# Altium PCB PCB1.PcbDoc
Units mm, origin at the board's own origin, x right, y up, seen from the top; angles counter-clockwise.
Board outline 75.06 x 40 mm, 2 copper layers (Top Layer, Bottom Layer); 15 components, 21 nets, 66 pads, 0 vias.
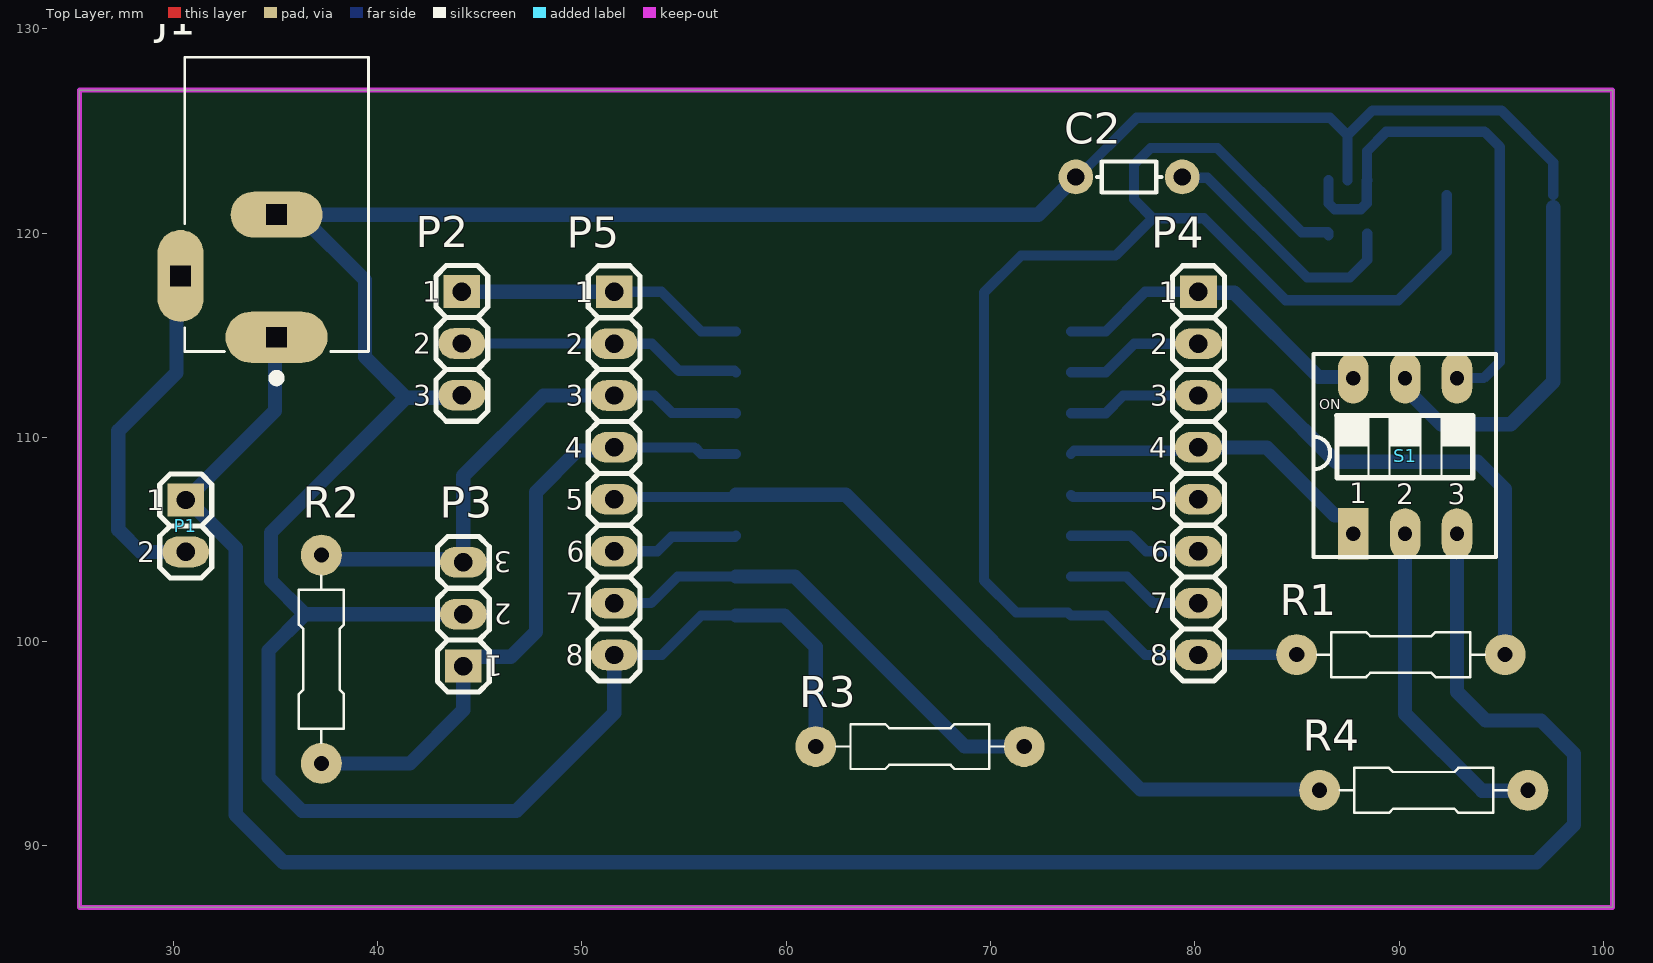
[diagram p0: Top Layer view]
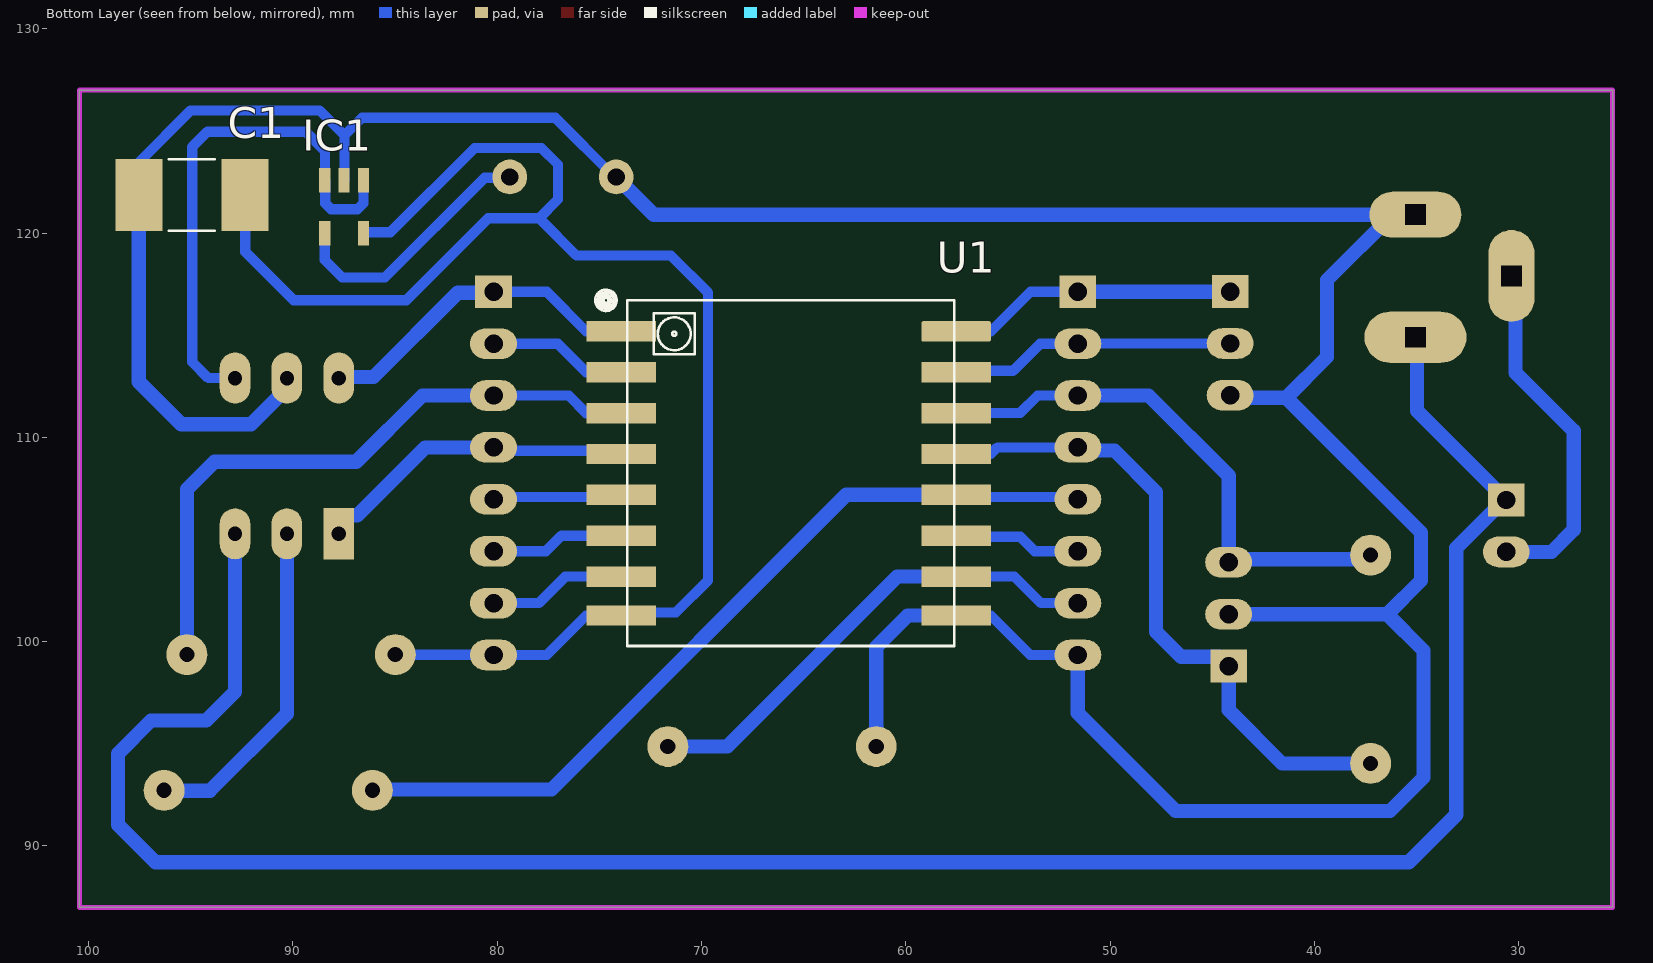
[diagram p1: Bottom Layer view, seen from below]

## Layer stack, top to bottom
Top Solder: solder mask 0.0102, Solder Resist, Dk 3.5
Top Layer: signal copper 0.0356
Dielectric 1: dielectric 0.32, FR-4, Dk 4.8
Bottom Layer: signal copper 0.0356
Bottom Solder: solder mask 0.0102, Solder Resist, Dk 3.5

## Board outline
25.4,86.995 25.4,127 100.457,127 100.457,86.995

## Design rules (kind name [scope] priority, off if disabled: settings)
Clearance Clearance_1 [All] p1: gap=0.254 ignorepadtopadclearanceinfootprint=FALSE except(0: Arc-Hole Track-Hole SMDPad-Hole THPad-Hole Via-Hole Fill-Hole Poly-Hole Region-Hole Text-Hole)
Clearance polygon [InPolygon] p2: gap=0.8 ignorepadtopadclearanceinfootprint=TRUE
PolygonConnect [All] p1: connectstyle=Relief reliefconductorwidth=0.254 reliefentries=4 polygonreliefangle="90 Angle" airgapwidth=0.254
RoutingVias [All] p1: holewidth=0.711 width=1.27 viastyle="Through Hole" minholewidth=0.711 minwidth=1.27 maxholewidth=0.711 maxwidth=1.27
SolderMaskExpansion [All] p1: expansion=0.102 istentingtop=FALSE
Width [All] p1: maxlimit=1 minlimit=0.254 preferedwidth=0.5
30 further rules are at their usual default settings.

## Components (designator, comment, footprint, x,y, rotation, side; value= is the part's Value field where it differs from the comment)
C1 "T491C106M025AT" CAPPC6032X280N 94.95,121.87 r0 bottom
C2 "Resistor vertical" Res50 77.99,122.75 r0 top value=470pF
IC1 "MIC5219BM5" SOT23-5 87.498,121.286 r0 bottom
J1 "PJ-002A" CUI_PJ-002A 35.052,114.904 r90 top
P1 "MHDR_1X02" MHDR1X02-254P 30.607,106.934 r270 top
P2 "MHDR_1X03" MHDR1X03-254P 44.12,117.14 r270 top
P3 "MHDR_1X03" MHDR1X03-254P 44.196,98.806 r90 top
P4 "MHDR_1X08" MHDR1X08-254P 80.18,117.13 r270 top
P5 "MHDR_1X08" MHDR1X08-254P 51.58,117.13 r270 top
R1 "10K" "Axial 0_25 W, 0_4 IN LEAD PITCH" 90.09,99.37 r180 top
R2 "4.7K" "Axial 0_25 W, 0_4 IN LEAD PITCH" 37.25,99.14 r90 top
R3 "10K" "Axial 0_25 W, 0_4 IN LEAD PITCH" 66.548,94.869 r0 top
R4 "1K" "Axial 0_25 W, 0_4 IN LEAD PITCH" 91.21,92.72 r180 top
S1 "switch3" switch 90.043,109.22 r0 top
U1 "ESP-07S" ESP07 65.913,109.347 r180 bottom

## Footprints (in the part's own frame and the unit in brackets; to place one, negate y for a bottom-side part, rotate by r counter-clockwise, add the part's x,y. Pads: shape width x height; smd on the part's side, far side on the other; paste and mask are expansions set on the pad)
"Axial 0_25 W, 0_4 IN LEAD PITCH" [mm] "Designer Abbas Basereh"
  round 2 hole 0.75: 1(5.1,0) 2(-5.1,0)
  silkscreen extent -4.1,-1.1 4.1,1.1, body extent -5.4,-1.16 5.36,1.16, height 3.63
CAPPC6032X280N [mm]
  rect 2.3x3.51 smd: 1(-2.61,0) 2(2.6,0)
  silkscreen extent -1.12,-1.75 1.12,1.75, body extent -3.15,-1.75 3.15,1.75, height 2.78
CUI_PJ-002A [mm]
  oval 2.5x5 hole 1 square: 1(0,0)
  oval 2.25x4.5 hole 1 square: 2(6,0)
  oval 4.5x2.25 hole 1 square: 3(3,4.7)
  silkscreen extent -2.2,-4.5 13.7,4.5, body extent -0.64,-4.45 13.76,4.95, height 11.01
ESP07 [mm]
  rect 3.4x1 smd: ADC(-8.026,3.841) EN(-8.026,1.841) GND(8.374,-8.064) GPIO0(8.374,-2.159) GPIO2(8.374,-4.159) GPIO4(8.374,-0.159) GPIO5(8.374,1.841) GPIO12(-8.026,-4.159) GPIO13(-8.026,-6.159) GPIO14(-8.026,-2.159) GPIO15(8.374,-6.159) GPIO16(-8.026,-0.159) REST(-8.026,5.841) RX(8.374,3.841) VCC(-8.026,-8.064)
  rrect17% 3.4x1 smd: TX(8.374,5.841)
  silkscreen extent -9.29,-9.56 8.27,7.89
MHDR1X02-254P [mm] "Male Header 1X02 with 2.54 mm Pitch"
  rect 1.6x1.8 hole 0.9: 1(0,0)
  oval 1.5x2.3 hole 0.9: 2(2.54,0)
  silkscreen extent -1.27,-1.27 3.81,1.27, body extent -1.27,-1.27 3.81,1.27, height 8.43
MHDR1X03-254P [mm] "Male Header 1X03 with 2.54 mm Pitch"
  rect 1.6x1.8 hole 0.9: 1(0,0)
  oval 1.5x2.3 hole 0.9: 2(2.54,0) 3(5.08,0)
  silkscreen extent -1.27,-1.27 6.35,1.27, body extent -1.27,-1.27 6.35,1.27, height 8.43
MHDR1X08-254P [mm] "Male Header 1X08 with 2.54 mm Pitch"
  rect 1.6x1.8 hole 0.9: 1(0,0)
  oval 1.5x2.3 hole 0.9: 2(2.54,0) 3(5.08,0) 4(7.62,0) 5(10.16,0) 6(12.7,0) 7(15.24,0) 8(17.78,0)
  silkscreen extent -1.27,-1.27 19.05,1.27, body extent -1.27,-1.27 19.05,1.27, height 8.43
Res50 [mm] "50mm Pin Spacing"
  round 1.7 hole 0.85: 1(-3.81,0) 2(1.397,0)
  silkscreen extent -2.77,-0.76 0.38,0.76
SOT23-5 [mm]
  rect 0.55x1.2 smd: 1(-0.95,-1.3) 2(0,-1.3) 3(0.95,-1.3) 4(0.95,1.3) 5(-0.95,1.3)
  body extent -1.45,-1.35 1.45,1.35, height 1.45
switch [mm]
  rect 1.5x2.5 hole 0.7: 1(-2.286,-3.937)
  oval 1.5x2.5 hole 0.7: 2(0.254,-3.937) 3(2.794,-3.937) 4(2.794,3.683) 5(0.254,3.683) 6(-2.286,3.683)
  silkscreen extent -4.23,-5.08 4.7,4.86, body extent -4.29,-5.07 4.79,4.83, height 6.8

## Part data
C1: "10ÂµF Molded Tantalum Capacitors 25V 2312 _6032 Metric_ 1.5Ohm", Package="2312 Kemet", Availability=Unavailable, MF=KEMET, MP=T491C106M025AT, Price=None, SnapEDA_Link=https://www.snapeda.com/parts/T491C106M025AT/KEMET/view-part/361304/?ref=snap
C2: "Resistor 0.5", Publisher="Seyed mohsen ghasemian", WEB=www.picpars.com
IC1: "Linear Voltage Regulator IC 1 Output 500mA SOT-23-5", Package="SOT-753 Micrel", Availability=Unavailable, MF=Micrel, MP=MIC5219BM5, Price=None, SnapEDA_Link=https://www.snapeda.com/parts/MIC5219BM5/Micrel/view-part/553192/?ref=snap
J1: "2,0 x 6,5 mm, 2,5 A, Yatay, AÃ§Ä±k Delik, Dc GÃ¼Ã§ JakÄ± KonnektÃ¶rÃ¼", Package=None, Availability=Unavailable, CUI_purchase_URL=https://www.cuidevices.com/product/interconnect/connectors/dc-power-connectors/jacks/pj-002a?utm_source=snapeda.com&utm_medium=referral&utm_campaign=snapedaBOM, MF="CUI Devices", MP=PJ-002A, Price=None, SnapEDA_Link=https://www.snapeda.com/parts/PJ-002A/CUI%20Devices/view-part/287588/?ref=snap
P1: "Male Header 1X02"
P2 P3: "Male Header 1X03"
P4 P5: "Male Header 1X08"
R1 R2 R3 R4: library part "RES Axial 0.25W", "RES Axial 0.25W", Data=4-1-2017, Desc.="RES Axial 0.25W", Designer="Abbas Basereh"
U1: "WiFi 802.11b/g/n Transceiver Module 2.4GHz ~ 2.5GHz PCB Trace Surface Mount", Package="Module RF Solutions", Availability=Unavailable, MF="RF Solutions", MP=ESP-07S, Price=None, SnapEDA_Link=https://www.snapeda.com/parts/ESP-07S/RF%20Solutions/view-part/1074529/?ref=snap

## Nets (pads, with @x,y where several pads share a name; then routed paths per layer and width w, separated by ;. In a path a pad name is that pad's centre, name@x,y a point inside that pad or via, vN(x,y) a via of type N, cw(c..) or ccw(c..) an arc to the next point about the centre after c; other vN are vias at no path point)
+3.3: C1.1 IC1.5 P4.8 R1.1 U1.VCC | length 75.2
  Bottom Layer w0.5: R1.1 84.98,99.36 80.19,99.36 P4.8 77.572,99.35 75.639,101.283 U1.VCC 73.792,101.43 71.26,101.43 69.68,103.01 69.68,117.08 71.505,118.905 76.125,118.905 77.95,120.73 ; IC1.5@86.548,119.9 86.548,120.015 86.522,120.04 85.23,120.04 81.1,124.17 77.84,124.17 77.03,123.36 77.03,121.65 77.95,120.73 ; C1.1 92.34,119.09 89.96,116.71 84.46,116.71 80.44,120.73 77.95,120.73
ADC: P4.2 U1.ADC | length 6.8
  Bottom Layer w0.5: U1.ADC 75.639,113.188 77.041,114.59 P4.2
EN: P4.3 R1.2 U1.EN | length 31.6
  Bottom Layer w0.5: U1.EN 75.639,111.188 76.501,112.05 P4.3
  Bottom Layer w0.7: P4.3 83.665,112.05 86.905,108.81 93.84,108.81 95.19,107.46 R1.2
GND: C1.2 C2.1 IC1.2 J1.2 P2.3 P3.2 P5.8 R3.2 S1.5 U1.GND | length 171
  Bottom Layer w0.5: P5.8 53.906,99.35 55.839,101.283 U1.GND ; C2.1 74.258,122.75 77.158,125.65 86.62,125.65 87.48,124.79 ; IC1.2@87.48,122.586 87.48,124.79 ; C1.2 97.55,123.46 95,126.01 88.7,126.01 87.48,124.79
  Bottom Layer w0.7: J1.2 J1.2@36.177,120.904 ; P2.3@44.09,111.96 44.07,111.94 41.38,111.94 ; P3.2 36.434,101.346 ; P5.8 51.58,96.51 46.78,91.71 36.3,91.71 34.66,93.35 34.66,99.572 36.434,101.346 ; U1.GND 59.907,101.283 61.448,99.742 R3.2 ; C2.1 72.334,120.904 J1.2@36.177,120.904 ; S1.5 90.297,112.403 92.06,110.64 95.47,110.64 97.55,112.72 C1.2@97.55,121.265 ; J1.2@36.177,120.904 39.38,117.701 39.38,113.94 41.38,111.94 ; 36.434,101.346 34.78,103 34.78,105.34 41.38,111.94
IO0: P5.5 R4.1 U1.GPIO0 | length 40.6
  Bottom Layer w0.5: P5.5 51.689,107.079 57.43,107.079 U1.GPIO0
  Bottom Layer w0.7: U1.GPIO0 62.922,107.188 77.35,92.76 R4.1@86.099,92.76
IO2: P5.6 U1.GPIO2 | length 6.3
  Bottom Layer w0.5: P5.6 53.69,104.43 54.4,105.14 57.491,105.14 U1.GPIO2
IO4: P3.1 P5.4 R2.2 U1.GPIO4 | length 32.1
  Bottom Layer w0.5: P5.4 55.517,109.51 55.839,109.188 U1.GPIO4
  Bottom Layer w0.7: R2.2 41.58,94.04 44.196,96.656 P3.1 44.646,99.256 46.516,99.256 47.75,100.49 47.75,107.32 49.787,109.357 51.427,109.357 P5.4
IO5: P3.3 P5.3 R2.1 U1.GPIO5 | length 26.7
  Bottom Layer w0.5: P5.3 53.54,112.05 54.39,111.2 57.527,111.2 U1.GPIO5
  Bottom Layer w0.7: R2.1 37.451,104.039 44.043,104.039 P3.3 44.196,108.126 48.12,112.05 P5.3
IO12: P4.6 U1.GPIO12 | length 6.6
  Bottom Layer w0.5: U1.GPIO12 76.862,105.188 77.62,104.43 P4.6
IO13: P4.7 U1.GPIO13 | length 6.8
  Bottom Layer w0.5: U1.GPIO13 76.672,103.188 77.97,101.89 P4.7
IO14: P4.5 U1.GPIO14 | length 6.3
  Bottom Layer w0.5: U1.GPIO14 74.048,107.079 80.071,107.079 P4.5
IO15: P5.7 R3.1 U1.GPIO15 | length 24.1
  Bottom Layer w0.5: P5.7 53.38,101.89 54.678,103.188 U1.GPIO15
  Bottom Layer w0.7: U1.GPIO15 60.422,103.188 68.741,94.869 R3.1
NetC2_2: C2.2 IC1.4 | length 12.8
  Bottom Layer w0.5: C2.2 79.422,122.715 80.615,122.715 85.5,117.83 87.59,117.83 88.448,118.688 IC1.4
NetJ1_3: J1.3 P1.2 | length 17.4
  Bottom Layer w0.7: J1.3 30.15,117.702 30.15,113.16 27.31,110.32 27.31,105.48 28.396,104.394 P1.2
RST: P4.1 S1.6 U1.REST | length 16.4
  Bottom Layer w0.5: U1.REST 75.639,115.188 77.581,117.13 P4.1
  Bottom Layer w0.7: P4.1 80.23,117.08 81.94,117.08 86.06,112.96 87.7,112.96 S1.6
RX: P2.2 P5.2 U1.RX | length 14
  Bottom Layer w0.5: P2.2 44.125,114.595 51.575,114.595 P5.2 53.42,114.59 54.75,113.26 57.467,113.26 U1.RX
SW1: P4.4 S1.1 U1.GPIO16 | length 16
  Bottom Layer w0.5: U1.GPIO16 74.1,109.349 80.019,109.349 P4.4
  Bottom Layer w0.7: P4.4 83.53,109.51 86.857,106.183 87.357,106.183 87.757,105.783 S1.1
SW2: R4.2 S1.2 | length 16.4
  Bottom Layer w0.7: S1.2 90.297,96.473 94.06,92.71 R4.2@96.365,92.71
SW3: J1.1 P1.1 S1.3 | length 111.7
  Bottom Layer w0.7: J1.1 34.98,114.832 34.98,111.307 P1.1 30.707,106.934 33.055,104.586 33.055,91.525 35.38,89.2 96.73,89.2 98.57,91.04 98.57,94.52 96.95,96.14 94.25,96.14 92.837,97.553 S1.3
TX: P2.1 P5.1 U1.TX | length 14.2
  Bottom Layer w0.5: P5.1 53.897,117.13 55.839,115.188 55.92,115.188 55.95,115.188 U1.TX
  Bottom Layer w0.7: P2.1 44.125,117.135 51.575,117.135 P5.1
VCC: IC1.1 IC1.3 S1.4 | length 25.9
  Bottom Layer w0.5: IC1.1 86.548,121.465 86.84,121.172 88.13,121.172 88.423,121.465 88.423,122.561 IC1.3 ; IC1.3@88.43,122.586 88.43,124.01 89.38,124.96 94.19,124.96 94.93,124.22 94.93,113.69 94.143,112.903 S1.4

## Polygon pours and split planes (outlines as drawn)
no net on Bottom Layer "NONET_L02_P000" (solid, remove dead copper, shelved, pour order 0): 25.4,127 100.457,127 100.457,86.995 25.4,86.995

## Keep-outs
Keep-Out Layer:
  the board outline again, w0.254

## Text inside footprints (layer, text, board x,y; h text height)
P1: Top Overlay "2" at 28.243,103.886 h1; Top Overlay "1" at 28.671,106.426 h1
P2: Top Overlay "3" at 41.756,111.552 h1; Top Overlay "2" at 41.756,114.092 h1; Top Overlay "1" at 42.184,116.632 h1
P3: Top Overlay "3" at 46.56,104.394 h1 r180; Top Overlay "2" at 46.56,101.854 h1 r180; Top Overlay "1" at 46.132,99.314 h1 r180
P4: Top Overlay "8" at 77.816,98.842 h1; Top Overlay "7" at 77.816,101.382 h1; Top Overlay "6" at 77.863,103.922 h1; Top Overlay "5" at 77.816,106.462 h1; Top Overlay "4" at 77.768,109.002 h1; Top Overlay "3" at 77.816,111.542 h1; Top Overlay "2" at 77.816,114.082 h1; Top Overlay "1" at 78.244,116.622 h1; Top Overlay "1" at 78.244,116.622 h1
P5: Top Overlay "8" at 49.216,98.842 h1; Top Overlay "7" at 49.216,101.382 h1; Top Overlay "6" at 49.264,103.922 h1; Top Overlay "5" at 49.216,106.462 h1; Top Overlay "4" at 49.168,109.002 h1; Top Overlay "3" at 49.216,111.542 h1; Top Overlay "2" at 49.216,114.082 h1; Top Overlay "1" at 49.644,116.622 h1; Top Overlay "1" at 49.644,116.622 h1
S1: Top Overlay "3" at 92.384,106.729 h1; Top Overlay "2" at 89.864,106.729 h1; Top Overlay "1" at 87.554,106.769 h1; Top Overlay "ON" at 86.106,111.379 h0.5